# EAGLE board CINTURA (EAGLE 8.0.1)
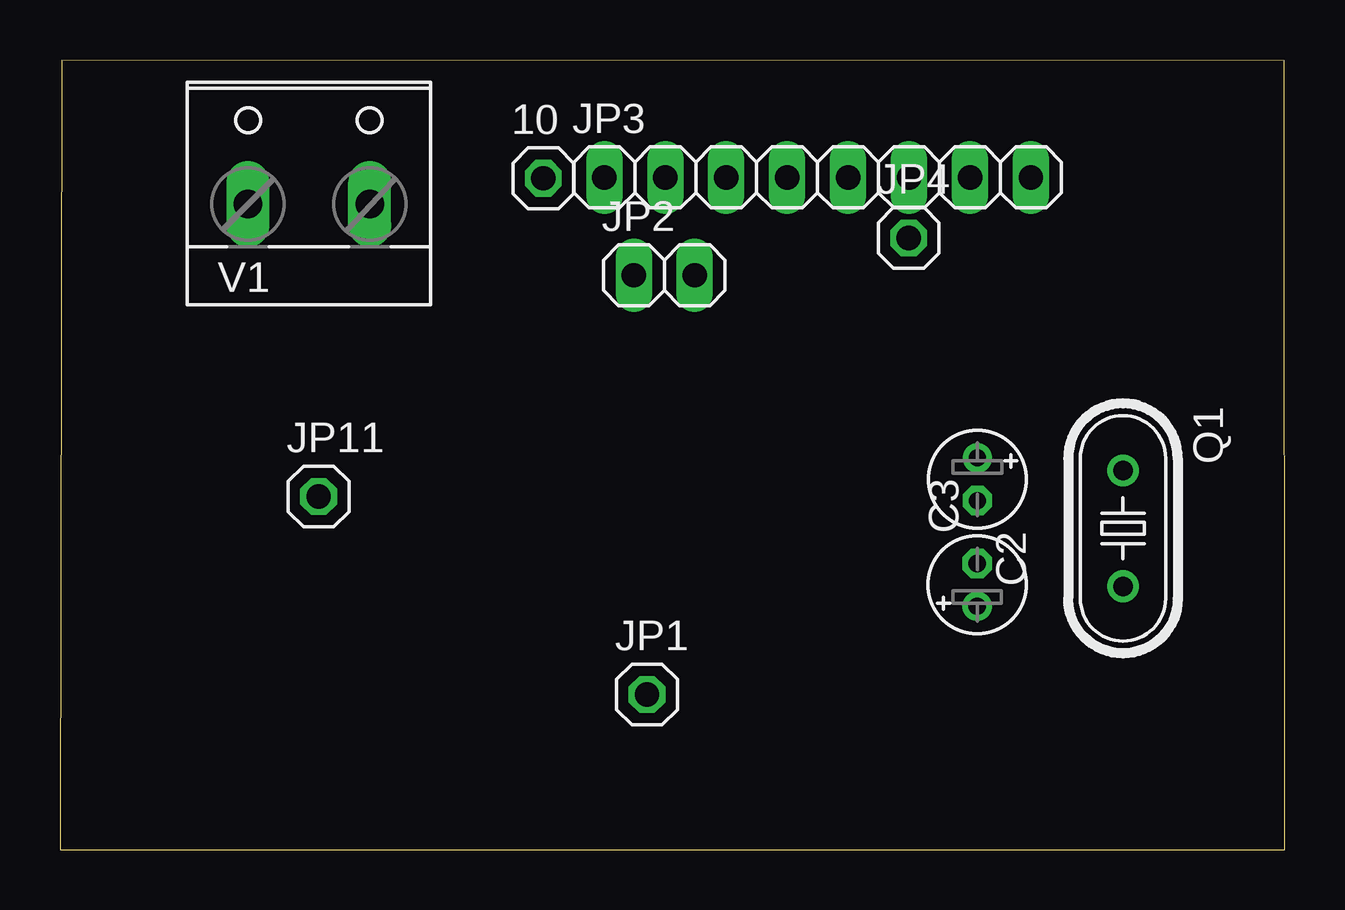
[diagram p0: board, top side]
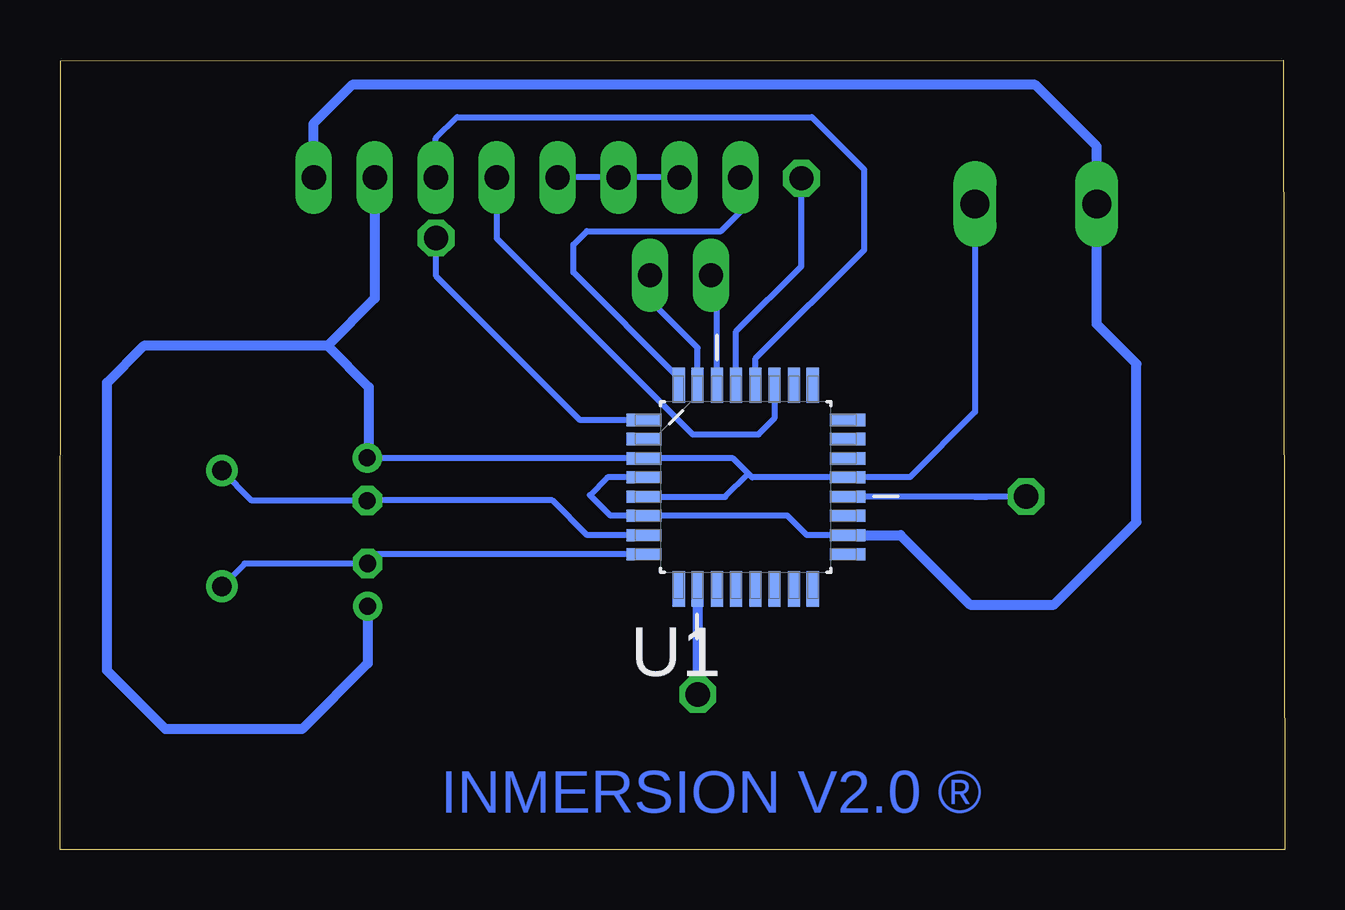
[diagram p1: board, bottom side, seen from below]

Size 51.05 x 32.91 mm. Coordinates in mm from the lower left corner, seen from the top.
Outline: 0,0 51.05,0 51.02,32.88 0.06,32.91 0,0
Copper layers (1*16): Top 0.035mm / dielectric 1.5mm / Bottom 0.035mm
Design rules "default": minimum track width 10mil, minimum drill 24mil, track to track 8mil, track to pad 8mil, pad to pad 8mil, via to via 8mil, smd to smd 8mil, copper to edge 40mil, drill to drill 8mil, minimum pad ring 10mil, minimum via ring 8mil, stop-mask expansion 4mil, vias tented up to drill 0mil, thermal gap 10mil

## Footprints (pad centres in the part's own frame; a part is rotated, then mirrored left to right if it is on the bottom)
1X01 = drill 1.016 octagon: 1 0,0
E1,8-4 = drill 0.711 pad 1.168: + -0.889,0 | drill 0.711 pad 1.168 octagon: - 0.889,0
1X02 = drill 1.016 long: 1 -1.27,0; 2 1.27,0
1X08 = drill 1.016 long: 1 -8.89,0; 2 -6.35,0; 3 -3.81,0; 4 -1.27,0; 5 1.27,0; 6 3.81,0; 7 6.35,0; 8 8.89,0
HC49U-V = drill 0.813: 1 -2.413,0; 2 2.413,0
QFP80P900X900X120-32N = smd 1.473 x 0.508: 1 -4.242,2.794; 2 -4.242,2.007; 3 -4.242,1.194; 4 -4.242,0.406; 5 -4.242,-0.406; 6 -4.242,-1.194; 7 -4.242,-2.007; 8 -4.242,-2.794; 17 4.242,-2.794; 18 4.242,-2.007; 19 4.242,-1.194; 20 4.242,-0.406; 21 4.242,0.406; 22 4.242,1.194; 23 4.242,2.007; 24 4.242,2.794 | smd 0.508 x 1.473: 9 -2.794,-4.242; 10 -2.007,-4.242; 11 -1.194,-4.242; 12 -0.406,-4.242; 13 0.406,-4.242; 14 1.194,-4.242; 15 2.007,-4.242; 16 2.794,-4.242; 25 2.794,4.242; 26 2.007,4.242; 27 1.194,4.242; 28 0.406,4.242; 29 -0.406,4.242; 30 -1.194,4.242; 31 -2.007,4.242; 32 -2.794,4.242
W237-132 = drill 1.194 long: 1 -2.54,-0.635; 2 2.54,-0.635

## Placement (x,y rotation side)
10  [1X01]  20.15,27.98 0 top
C2  [E1,8-4]  38.24,15.44 270 top
C3  [E1,8-4]  38.23,11.04 90 top
JP1  [1X01]  24.47,6.47 0 top
JP2  [1X02]  25.19,23.94 0 top
JP3  [1X08]  31.58,28.02 0 top
JP4  [1X01]  35.38,25.49 0 top
JP11  [1X01]  10.78,14.72 0 top
Q1  [HC49U-V]  44.31,13.39 270 top
U1  ATMEGA328P-AU  [QFP80P900X900X120-32N]  22.47,15.11 0 bottom
V1  [W237-132]  10.38,27.54 0 top

## Library data of the parts
10 JP1-JP4 JP11 = pinhead
C2 C3 = rcl
Q1 = crystal; OC_FARNELL: 1666969; OC_NEWARK: unknown
U1 = Ava; DESCRIPTION: 8-bit Microcontroller with In-System Programmable Flash; MPN: ATMEGA328P-AU; OC_FARNELL: 1715486; OC_NEWARK: 14R4631; PACKAGE: TQFP-32; SUPPLIER: Atmel
V1 = con-wago-508; OC_FARNELL: unknown; OC_NEWARK: unknown

## Nets
D2: JP3.1 U1.32
GND: C2.+ C3.+ JP3.7 U1.3 U1.5 U1.21 V1.2
LOADER3: 10.1 U1.29
N$1: JP1.1 U1.10
N$2: JP4.1 U1.1
N$3: JP11.1 U1.20
N$5: JP2.1 U1.30
N$6: JP2.2 U1.31
NC: JP3.2 JP3.3 JP3.4
SCL: JP3.6 U1.28
SDA: JP3.5 U1.27
VCC: JP3.8 U1.4 U1.6 U1.18 V1.1
XTAL0: C2.- Q1.1 U1.7
XTAL1: C3.- Q1.2 U1.8

## Tracks (layer width: path | path; a pad name or v marks a point on that pad's centre or on a via)
D2
  Bottom 0.254: U1.32 25.26,19.67 29.66,24.06 29.66,25.22 29.09,25.78 23.5,25.78 22.69,26.59 JP3.1
GND
  Bottom 0.254: 22.36,15.67 22.21,15.52 U1.21 18.21,15.53 15.62,15.53 12.92,18.24 V1.2 | 22.36,15.67 23,16.31 U1.3 | U1.5 23.33,14.71 22.36,15.67 | U1.3 | U1.3 38.22,16.31 C2.+
  Bottom 0.406: 37.97,27.98 JP3.7 37.93,22.98 39.91,21 | C3.+ 38.23,7.77 40.97,5.03 46.66,5.03 49.09,7.47 49.09,19.47 47.56,21 39.91,21 | 39.91,21 38.19,19.28 38.19,16.39 C2.+
LOADER3
  Bottom 0.254: U1.29 22.87,21.6 20.16,24.31 20.16,27.97 10.1
N$1
  Bottom 0.406: U1.10 JP1.1
N$2
  Bottom 0.254: U1.1 29.37,17.91 35.37,23.91 JP4.1
N$3
  Bottom 0.254: 12.94,14.71 U1.20 | 12.94,14.71 12.42,14.71 | JP11.1 12.92,14.72 12.94,14.71
N$5
  Bottom 0.254: U1.30 23.66,23.68 JP2.1
N$6
  Bottom 0.254: U1.31 24.47,20.91 26.47,22.91 JP2.2
NC
  Bottom 0.254: JP3.2 JP3.3 JP3.4
SCL
  Bottom 0.254: JP3.6 35.39,29.64 34.5,30.53 19.72,30.53 17.53,28.34 17.53,25 22.06,20.47 U1.28
SDA
  Bottom 0.254: U1.27 21.27,17.98 21.94,17.31 24.69,17.31 32.85,25.48 JP3.5
VCC
  Bottom 0.254: U1.18 18.25,13.13 19.94,13.13 20.73,13.92 U1.6 28.11,13.92 28.97,14.78 28.23,15.52 U1.4 | 26.72,15.53 U1.4 | 26.73,15.5 U1.4
  Bottom 0.406: JP3.8 40.5,28.05 40.5,30.25 38.87,31.88 10.41,31.88 7.84,29.3 V1.1 7.84,21.91 6.19,20.25 6.19,13.66 9.62,10.22 13.12,10.22 16.01,13.11 U1.18
XTAL0
  Bottom 0.254: U1.7 29.07,13.11 30.53,14.56 38.23,14.56 C2.- 43.05,14.55 Q1.1
XTAL1
  Bottom 0.254: U1.8 37.84,12.32 C3.- 43.36,11.93 Q1.2

## Text on the board
Bottom: INMERSION V2.0 ®